# Altium PCB PCB1.PcbDoc
Units mm, origin at the board's own origin, x right, y up, seen from the top; angles counter-clockwise.
Board outline 34 x 22 mm, 2 copper layers (Top Layer, Bottom Layer); 3 components, 3 nets, 9 pads, 18 vias.
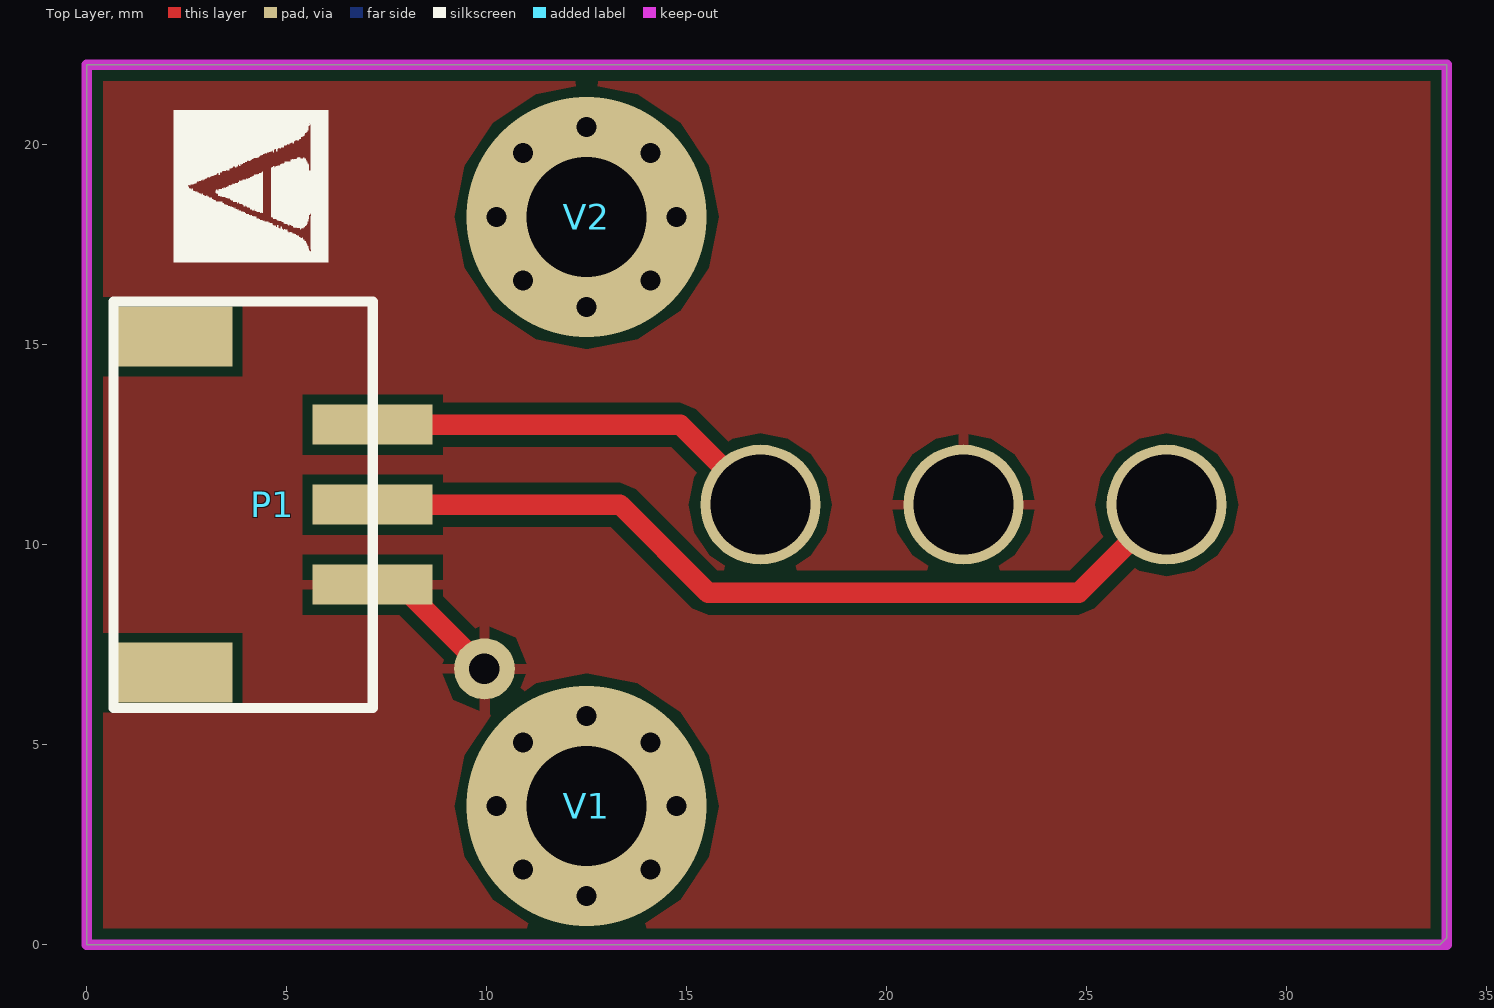
[diagram p0: Top Layer view]
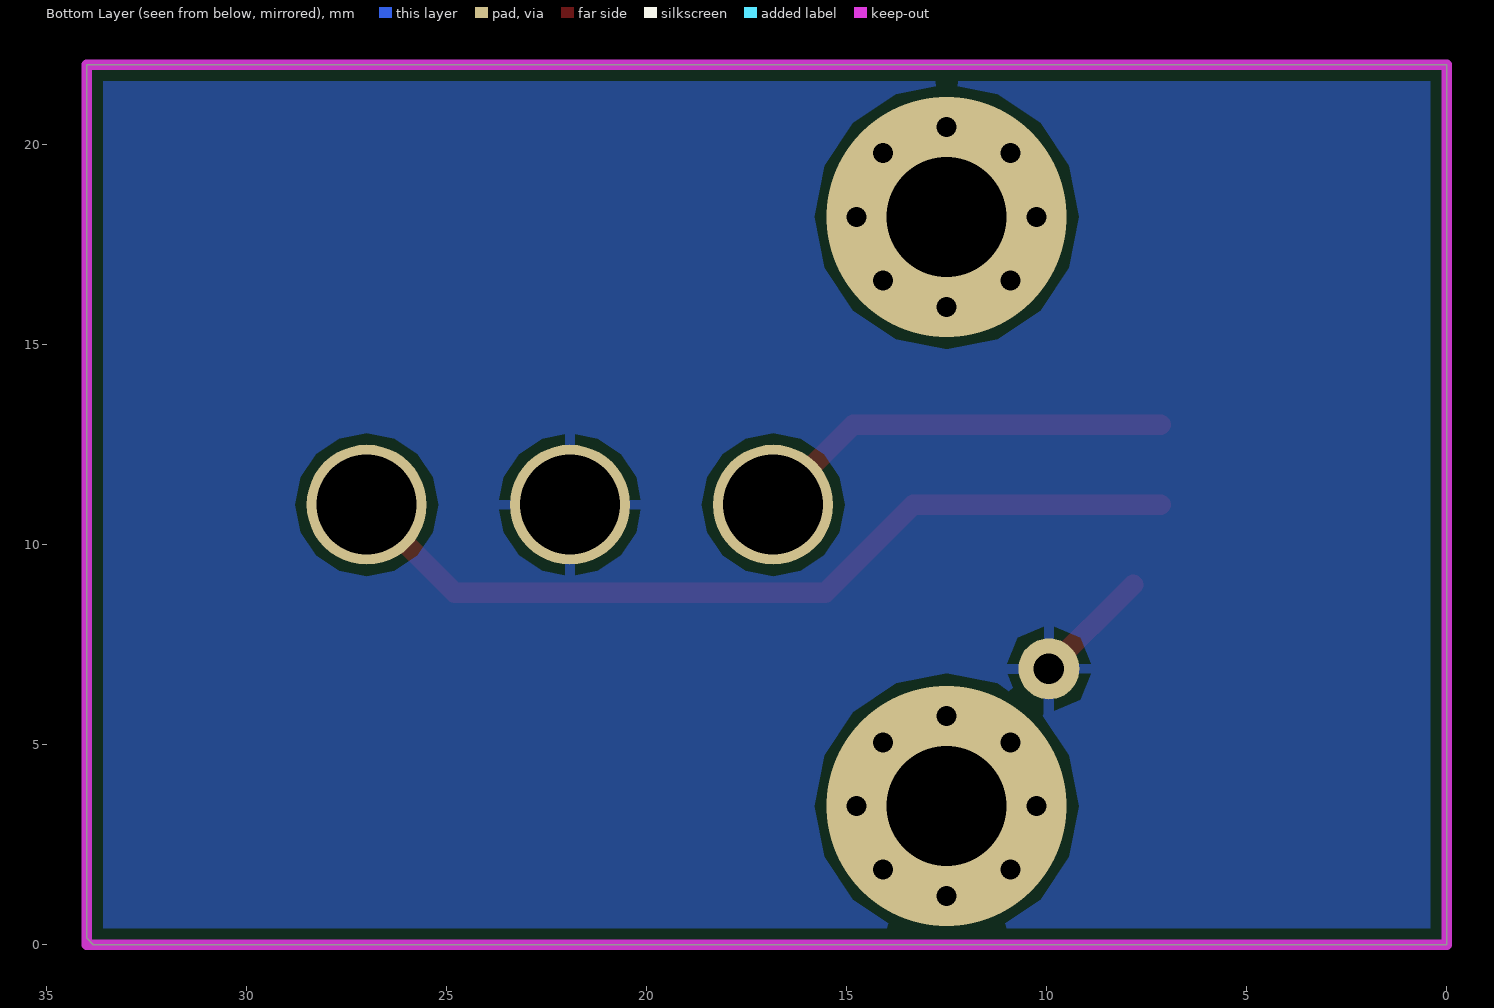
[diagram p1: Bottom Layer view, seen from below]

## Layer stack, top to bottom
Top Layer: signal copper 0.0356
Dielectric: dielectric 0.32, FR-4, Dk 4.8
Bottom Layer: signal copper 0.0356

## Board outline
0,22 34,22 34,0.165 33.835,0 0,0

## Design rules (kind name [scope] priority, off if disabled: settings)
Clearance [All] p1: gap=0.254
PolygonConnect [All] p1: connectstyle=Relief reliefconductorwidth=0.254 reliefentries=4 polygonreliefangle="90 Angle"
RoutingVias [All] p1: holewidth=0.711 width=1.27 viastyle="Through Hole" minholewidth=0.711 minwidth=1.27 maxholewidth=0.711 maxwidth=1.27
SilkscreenOverComponentPads [All] p1: minsilkscreentomaskgap=0.254
SolderMaskExpansion [All] p1: expansion=0.102
Width [All] p1: maxlimit=1.27 minlimit=0.254 preferedwidth=1.27 minimp=50.000000 maximp=50.000000 favimp=50.000000
27 further rules are at their usual default settings.

## Components (designator, comment, footprint, x,y, rotation, side; value= is the part's Value field where it differs from the comment)
P1 "Header 3" sh-2.0 7.15,11 r270 top
V1 "Via" Via 12.5,3.467 r0 top
V2 "Via" Via 12.5,18.199 r0 top

## Footprints (in the part's own frame and the unit in brackets; to place one, negate y for a bottom-side part, rotate by r counter-clockwise, add the part's x,y. Pads: shape width x height; smd on the part's side, far side on the other; paste and mask are expansions set on the pad)
sh-2.0 [mm]
  rect 1x3 smd: 1(-2,0) 2(0,0) 3(2,0)
  rect 1.5x3 smd: GND(-4.2,-5) GND(4.2,-5)
  silkscreen extent -5.08,-6.48 5.08,0
Via [mm]

## Part data
P1: "Header, 3-Pin"

## Free pads (board coordinates)
  round 1.524 hole 0.762: 3(9.944,6.896)
  round 3 hole 2.5: 3(16.84,11) 3(21.92,11) 3(27,11)

## Via types
v1: diameter 1, hole 0.5, Top Layer to Bottom Layer, 16 vias
v2: diameter 6, hole 3, Top Layer to Bottom Layer, 2 vias

## Nets (pads, with @x,y where several pads share a name; then routed paths per layer and width w, separated by ;. In a path a pad name is that pad's centre, name@x,y a point inside that pad or via, vN(x,y) a via of type N, cw(c..) or ccw(c..) an arc to the next point about the centre after c; other vN are vias at no path point)
GND: P1.3 pad.3@9.944,6.896 pad.3@21.92,11 | length 3
  Top Layer w0.508: P1.3@7.84,9 pad.3@9.944,6.896
OUT: P1.1 pad.3@16.84,11 | length 10.5
  Top Layer w0.508: P1.1 14.84,13 pad.3@16.84,11
VCC: P1.2 pad.3@27,11 | length 21.7
  Top Layer w0.508: P1.2 13.333,11 15.532,8.801 24.801,8.801 pad.3@27,11
pads on no net: P1.GND
copper on no net:
  other v1: 12.5,1.217 10.909,1.876 14.091,1.876 10.25,3.467 14.75,3.467 10.909,5.058 14.091,5.058 12.5,5.717 12.5,15.949 10.909,16.608 14.091,16.608 10.25,18.199 14.75,18.199 10.909,19.79 14.091,19.79 12.5,20.449
  other v2: 12.5,3.467 12.5,18.199

## Polygon pours and split planes (outlines as drawn)
GND on Top Layer "Top Layer-No Net" (solid, pour order 6): 0,22 34,22 34,0 0,0
GND on Bottom Layer "Top Layer-No Net" (solid, pour order 8): 0,22 34,22 34,0 0,0

## Keep-outs
Keep-Out Layer:
  lines w0.254: 0,0 34,0 34,22 0,22 0,0

## Silkscreen, mask and mechanical layers (free items; w line width, h text height)
Top Overlay:
  drawing of 1205 lines, arcs and shapes, not listed
Top Solder:
  text "Rotation Sensor" at 16.04,1.181 h1.2